# Altium PCB WorldClock.PcbDoc (part 5 of 13)
Units mil, origin at the board's own origin, x right, y up, seen from the top; angles counter-clockwise.
Board outline 3700 x 3850 mil, 2 copper layers (Top Layer, Bottom Layer); 227 components, 134 nets, 1324 pads, 248 vias.
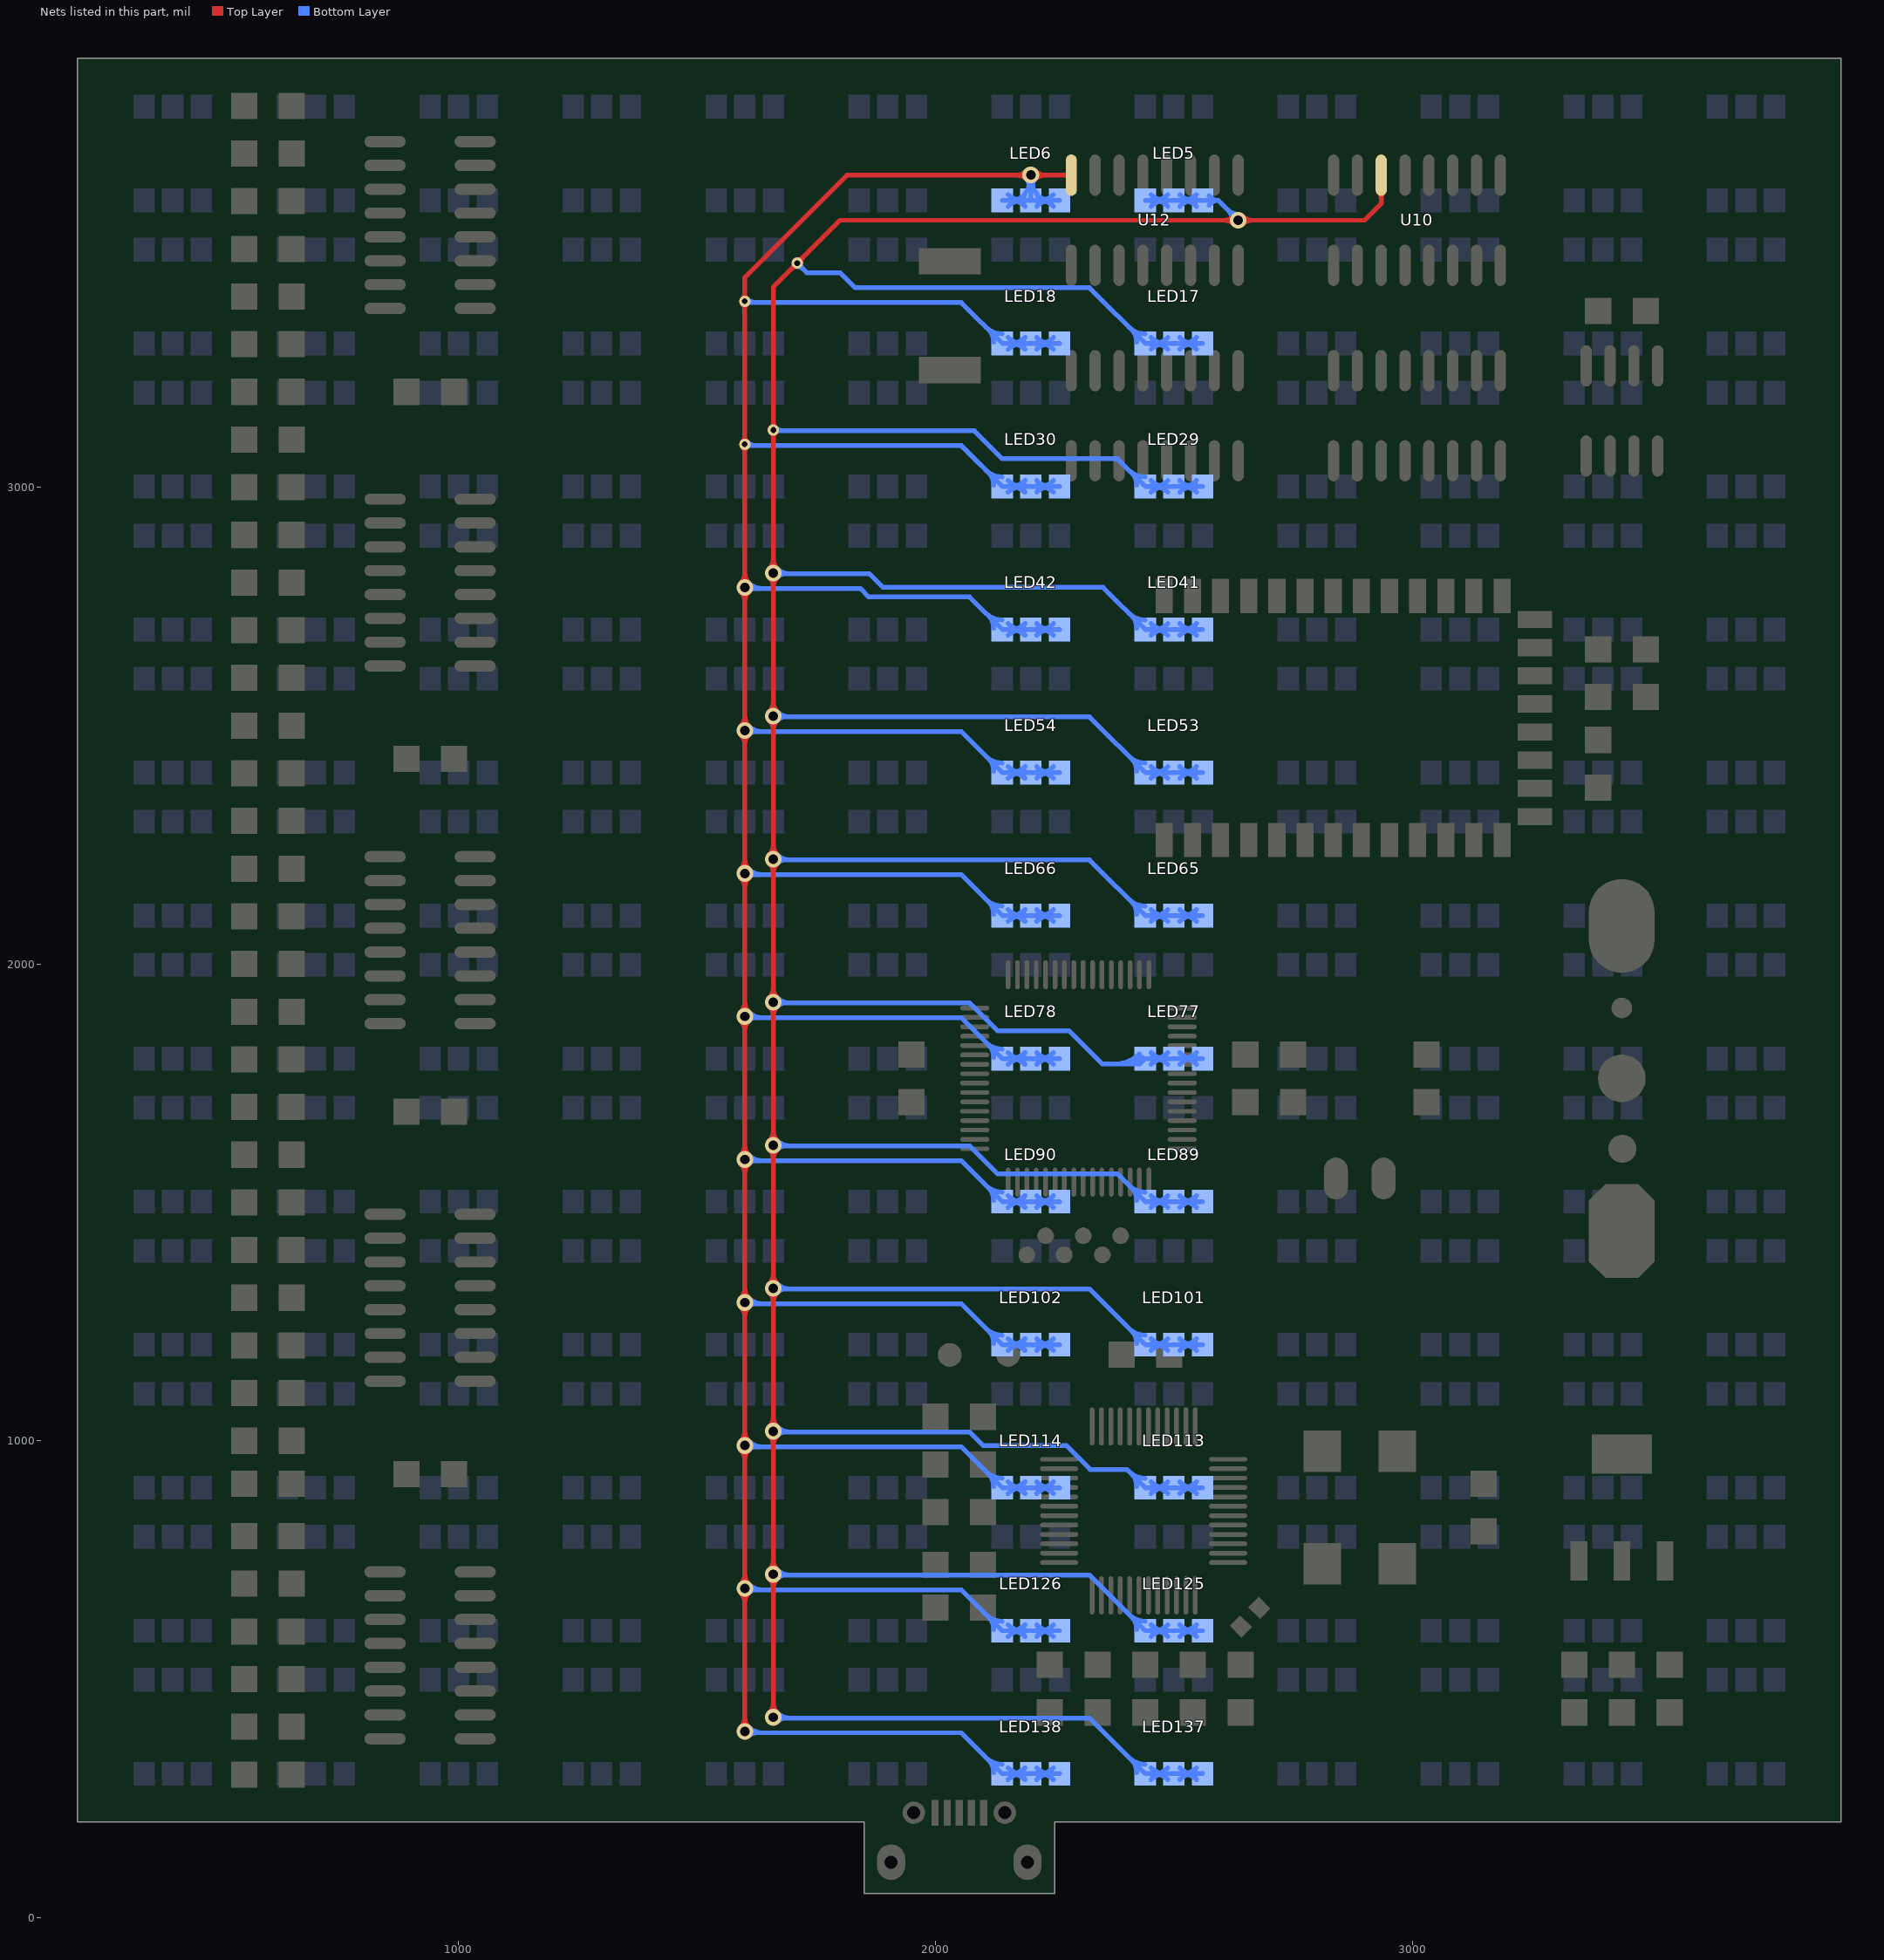
[diagram p5: the nets of this part, all layers, seen from the top]

## Via types
v1: diameter 35, hole 20, Top Layer to Bottom Layer, tented both sides, 213 vias
v2: diameter 24, hole 12, Top Layer to Bottom Layer, tented both sides, 35 vias

## Nets (pads, with @x,y where several pads share a name; then routed paths per layer and width w, separated by ;. In a path a pad name is that pad's centre, name@x,y a point inside that pad or via, vN(x,y) a via of type N, cw(c..) or ccw(c..) an arc to the next point about the centre after c; other vN are vias at no path point) (continued)
CH5: LED5.4 LED5.5 LED5.6 LED17.4 LED17.5 LED17.6 LED29.4 LED29.5 LED29.6 LED41.4 LED41.5 LED41.6 LED53.4 LED53.5 LED53.6 LED65.4 LED65.5 LED65.6 LED77.4 LED77.5 LED77.6 LED89.4 LED89.5 LED89.6 LED101.4 LED101.5 LED101.6 LED113.4 LED113.5 LED113.6 LED125.4 LED125.5 LED125.6 LED137.4 LED137.5 LED137.6 U10.14 | length 21913.4
  Top Layer w10: v1@1651.16,428.84 ccw(c1629.82,450.18) 1660,450.18 ccw(c1690.18,450.18) v1@1668.84,428.84 ; v1@1651.16,711.16 cw(c1629.82,689.82) 1660,689.82 cw(c1690.18,689.82) v1@1668.84,711.16 ; v1@1651.16,728.84 ccw(c1629.82,750.18) 1660,750.18 ccw(c1690.18,750.18) v1@1668.84,728.84 ; v1@1651.16,1011.16 cw(c1629.82,989.82) 1660,989.82 cw(c1690.18,989.82) v1@1668.84,1011.16 ; v1@1651.16,1028.84 ccw(c1629.82,1050.18) 1660,1050.18 ccw(c1690.18,1050.18) v1@1668.84,1028.84 ; v1@1651.16,1311.16 cw(c1629.82,1289.82) 1660,1289.82 cw(c1690.18,1289.82) v1@1668.84,1311.16 ; v1@1651.16,1328.84 ccw(c1629.82,1350.18) 1660,1350.18 ccw(c1690.18,1350.18) v1@1668.84,1328.84 ; v1@1651.16,1611.16 cw(c1629.82,1589.82) 1660,1589.82 cw(c1690.18,1589.82) v1@1668.84,1611.16 ; v1@1651.16,1628.84 ccw(c1629.82,1650.18) 1660,1650.18 ccw(c1690.18,1650.18) v1@1668.84,1628.84 ; v1@1651.16,1911.16 cw(c1629.82,1889.82) 1660,1889.82 cw(c1690.18,1889.82) v1@1668.84,1911.16 ; v1@1651.16,1928.84 ccw(c1629.82,1950.18) 1660,1950.18 ccw(c1690.18,1950.18) v1@1668.84,1928.84 ; v1@1651.16,2211.16 cw(c1629.82,2189.82) 1660,2189.82 cw(c1690.18,2189.82) v1@1668.84,2211.16 ; v1@1651.16,2228.84 ccw(c1629.82,2250.18) 1660,2250.18 ccw(c1690.18,2250.18) v1@1668.84,2228.84 ; v1@1651.16,2511.16 cw(c1629.82,2489.82) 1660,2489.82 cw(c1690.18,2489.82) v1@1668.84,2511.16 ; v1@1651.16,2528.84 ccw(c1629.82,2550.18) 1660,2550.18 ccw(c1690.18,2550.18) v1@1668.84,2528.84 ; v1@1651.16,2811.16 cw(c1629.82,2789.82) 1660,2789.82 cw(c1690.18,2789.82) v1@1668.84,2811.16 ; v1@1651.16,2828.84 ccw(c1629.82,2850.18) 1660,2850.18 ccw(c1690.18,2850.18) v1@1668.84,2828.84 ; v2@1655.05,3115.05 cw(c1643.1,3103.1) 1660,3103.1 cw(c1676.9,3103.1) v2@1664.95,3115.05 ; v2@1655.05,3124.95 ccw(c1643.1,3136.9) 1660,3136.9 ccw(c1676.9,3136.9) v2@1664.95,3124.95 ; v1(1660,420) v1(1660,720) v1(1660,1020) v1(1660,1320) v1(1660,1620) v1(1660,1920) v1(1660,2220) v1(1660,2520) v1(1660,2820) v2(1660,3120) 1660,3420 v2(1710,3470) 1800,3560 v1(2635,3560) 2900,3560 2935,3595 U10.14@2935,3654.49 ; v2@1703,3470 cw(c1686.1,3470) 1698.05,3458.05 cw(c1710,3446.1) v2@1710,3463 ; v2@1710,3477 ccw(c1710,3493.9) 1721.95,3481.95 ccw(c1733.9,3470) v2@1717,3470 ; v1@2626.16,3551.16 ccw(c2604.82,3529.82) 2604.82,3560 ccw(c2604.82,3590.18) v1@2626.16,3568.84 ; v1@2643.84,3551.16 cw(c2665.18,3529.82) 2665.18,3560 cw(c2665.18,3590.18) v1@2643.84,3568.84 ; U10.14@2930.18,3618.18 cw(c2918.56,3606.55) 2935,3606.55 cw(c2951.44,3606.55) U10.14@2939.82,3618.18
  Bottom Layer w10: v1(1660,420) 1661.57,418.43 2323.15,418.43 LED137.6@2440,301.57 LED137.5@2500,301.57 LED137.4@2560,301.57 ; v1(1660,720) 1661.57,718.43 2323.15,718.43 LED125.6@2440,601.57 LED125.5@2500,601.57 LED125.4@2560,601.57 ; v1(1660,1020) 1661.57,1018.43 2071.57,1018.43 2100,990 2274.54,990 2324.54,940 2401.57,940 LED113.6@2440,901.57 LED113.5@2500,901.57 LED113.4@2560,901.57 ; v1(1660,1320) 1661.57,1318.43 2323.15,1318.43 LED101.6@2440,1201.57 LED101.5@2500,1201.57 LED101.4@2560,1201.57 ; v1(1660,1620) 1661.57,1618.43 2071.57,1618.43 2130,1560 2381.57,1560 LED89.6@2440,1501.57 LED89.5@2500,1501.57 LED89.4@2560,1501.57 ; v1(1660,1920) 1661.57,1918.43 2071.57,1918.43 2130,1860 2280,1860 2350,1790 2428.43,1790 LED77.6@2440,1801.57 LED77.5@2500,1801.57 LED77.4@2560,1801.57 ; v1(1660,2220) 1661.57,2218.43 2323.15,2218.43 LED65.6@2440,2101.57 LED65.5@2500,2101.57 LED65.4@2560,2101.57 ; v1(1660,2520) 1661.57,2518.43 2323.15,2518.43 LED53.6@2440,2401.57 LED53.5@2500,2401.57 LED53.4@2560,2401.57 ; v1(1660,2820) 1661.57,2818.43 1861.57,2818.43 1890,2790 2351.57,2790 LED41.6@2440,2701.57 LED41.5@2500,2701.57 LED41.4@2560,2701.57 ; v2(1660,3120) 1661.57,3118.43 2081.57,3118.43 2140,3060 2381.57,3060 LED29.6@2440,3001.57 LED29.5@2500,3001.57 LED29.4@2560,3001.57 ; v2@1664.95,3115.05 cw(c1673.1,3106.9) 1673.1,3118.43 ; v2@1664.95,3124.95 ccw(c1680.7,3140.7) 1680.7,3118.43 ; v1@1668.84,411.16 cw(c1686.38,393.62) 1686.38,418.43 ; v1@1668.84,428.84 ccw(c1693.98,453.98) 1693.98,418.43 ; v1@1668.84,711.16 cw(c1686.38,693.62) 1686.38,718.43 ; v1@1668.84,728.84 ccw(c1693.98,753.98) 1693.98,718.43 ; v1@1668.84,1011.16 cw(c1686.38,993.62) 1686.38,1018.43 ; v1@1668.84,1028.84 ccw(c1693.98,1053.98) 1693.98,1018.43 ; v1@1668.84,1311.16 cw(c1686.38,1293.62) 1686.38,1318.43 ; v1@1668.84,1328.84 ccw(c1693.98,1353.98) 1693.98,1318.43 ; v1@1668.84,1611.16 cw(c1686.38,1593.62) 1686.38,1618.43 ; v1@1668.84,1628.84 ccw(c1693.98,1653.98) 1693.98,1618.43 ; v1@1668.84,1911.16 cw(c1686.38,1893.62) 1686.38,1918.43 ; v1@1668.84,1928.84 ccw(c1693.98,1953.98) 1693.98,1918.43 ; v1@1668.84,2211.16 cw(c1686.38,2193.62) 1686.38,2218.43 ; v1@1668.84,2228.84 ccw(c1693.98,2253.98) 1693.98,2218.43 ; v1@1668.84,2511.16 cw(c1686.38,2493.62) 1686.38,2518.43 ; v1@1668.84,2528.84 ccw(c1693.98,2553.98) 1693.98,2518.43 ; v1@1668.84,2811.16 cw(c1686.38,2793.62) 1686.38,2818.43 ; v1@1668.84,2828.84 ccw(c1693.98,2853.98) 1693.98,2818.43 ; v2@1710,3463 cw(c1710,3446.1) 1721.95,3458.05 cw(c1733.9,3470) v2@1717,3470 ; v2(1710,3470) 1730,3450 1800,3450 1831.57,3418.43 2323.15,3418.43 LED17.6@2440,3301.57 LED17.5@2500,3301.57 LED17.4@2560,3301.57 ; 2375.84,1790 ccw(c2375.84,1863.23) LED77.6@2427.63,1811.45 ; 2399.98,1790 ccw(c2399.98,1839.09) LED77.6@2434.7,1804.38 ; 2405.86,335.72 ccw(c2440,369.86) LED137.6@2440,321.57 ; 2405.86,635.72 ccw(c2440,669.86) LED125.6@2440,621.57 ; 2405.86,935.72 ccw(c2440,969.86) LED113.6@2440,921.57 ; 2405.86,1235.72 ccw(c2440,1269.86) LED101.6@2440,1221.57 ; 2405.86,1535.72 ccw(c2440,1569.86) LED89.6@2440,1521.57 ; 2405.86,2135.72 ccw(c2440,2169.86) LED65.6@2440,2121.57 ; 2405.86,2435.72 ccw(c2440,2469.86) LED53.6@2440,2421.57 ; 2405.86,2735.72 ccw(c2440,2769.86) LED41.6@2440,2721.57 ; 2405.86,3035.72 ccw(c2440,3069.86) LED29.6@2440,3021.57 ; 2405.86,3335.72 ccw(c2440,3369.86) LED17.6@2440,3321.57 ; 2411.89,329.68 cw(c2386.29,304.07) LED137.6@2422.5,304.07 ; 2411.89,629.68 cw(c2386.29,604.07) LED125.6@2422.5,604.07 ; 2411.89,929.68 cw(c2386.29,904.07) LED113.6@2422.5,904.07 ; 2411.89,1229.68 cw(c2386.29,1204.07) LED101.6@2422.5,1204.07 ; 2411.89,1529.68 cw(c2386.29,1504.07) LED89.6@2422.5,1504.07 ; 2411.89,2129.68 cw(c2386.29,2104.07) LED65.6@2422.5,2104.07 ; 2411.89,2429.68 cw(c2386.29,2404.07) LED53.6@2422.5,2404.07 ; 2411.89,2729.68 cw(c2386.29,2704.07) LED41.6@2422.5,2704.07 ; 2411.89,3029.68 cw(c2386.29,3004.07) LED29.6@2422.5,3004.07 ; 2411.89,3329.68 cw(c2386.29,3304.07) LED17.6@2422.5,3304.07 ; LED5.6@2440,3601.57 LED5.5@2500,3601.57 LED5.4@2560,3601.57 2593.43,3601.57 v1(2635,3560) ; LED137.6@2452.37,289.2 cw(c2482.25,259.33) 2482.25,301.57 cw(c2482.25,343.82) LED137.6@2452.37,313.95 ; LED125.6@2452.37,589.2 cw(c2482.25,559.33) 2482.25,601.57 cw(c2482.25,643.82) LED125.6@2452.37,613.95 ; LED113.6@2452.37,889.2 cw(c2482.25,859.33) 2482.25,901.57 cw(c2482.25,943.82) LED113.6@2452.37,913.95 ; LED101.6@2452.37,1189.2 cw(c2482.25,1159.33) 2482.25,1201.57 cw(c2482.25,1243.82) LED101.6@2452.37,1213.95 ; LED89.6@2452.37,1489.2 cw(c2482.25,1459.33) 2482.25,1501.57 cw(c2482.25,1543.82) LED89.6@2452.37,1513.95 ; LED77.6@2452.37,1789.2 cw(c2482.25,1759.33) 2482.25,1801.57 cw(c2482.25,1843.82) LED77.6@2452.37,1813.95 ; LED65.6@2452.37,2089.2 cw(c2482.25,2059.33) 2482.25,2101.57 cw(c2482.25,2143.82) LED65.6@2452.37,2113.95 ; LED53.6@2452.37,2389.2 cw(c2482.25,2359.33) 2482.25,2401.57 cw(c2482.25,2443.82) LED53.6@2452.37,2413.95 ; LED41.6@2452.37,2689.2 cw(c2482.25,2659.33) 2482.25,2701.57 cw(c2482.25,2743.82) LED41.6@2452.37,2713.95 ; LED29.6@2452.37,2989.2 cw(c2482.25,2959.33) 2482.25,3001.57 cw(c2482.25,3043.82) LED29.6@2452.37,3013.95 ; LED17.6@2452.37,3289.2 cw(c2482.25,3259.33) 2482.25,3301.57 cw(c2482.25,3343.82) LED17.6@2452.37,3313.95 ; LED5.6@2452.37,3589.2 cw(c2482.25,3559.33) 2482.25,3601.57 cw(c2482.25,3643.82) LED5.6@2452.37,3613.95 ; LED137.6@2455.16,295.32 cw(c2471.02,286.17) 2466.28,303.86 ; LED137.6@2455.16,307.82 ccw(c2471.02,316.98) 2466.28,299.29 ; LED125.6@2455.16,595.32 cw(c2471.02,586.17) 2466.28,603.86 ; LED125.6@2455.16,607.82 ccw(c2471.02,616.98) 2466.28,599.29 ; LED113.6@2455.16,895.32 cw(c2471.02,886.17) 2466.28,903.86 ; LED113.6@2455.16,907.82 ccw(c2471.02,916.98) 2466.28,899.29 ; LED101.6@2455.16,1195.32 cw(c2471.02,1186.17) 2466.28,1203.86 ; LED101.6@2455.16,1207.82 ccw(c2471.02,1216.98) 2466.28,1199.29 ; LED89.6@2455.16,1495.32 cw(c2471.02,1486.17) 2466.28,1503.86 ; LED89.6@2455.16,1507.82 ccw(c2471.02,1516.98) 2466.28,1499.29 ; LED77.6@2455.16,1795.32 cw(c2471.02,1786.17) 2466.28,1803.86 ; LED77.6@2455.16,1807.82 ccw(c2471.02,1816.98) 2466.28,1799.29 ; LED65.6@2455.16,2095.32 cw(c2471.02,2086.17) 2466.28,2103.86 ; LED65.6@2455.16,2107.82 ccw(c2471.02,2116.98) 2466.28,2099.29 ; LED53.6@2455.16,2395.32 cw(c2471.02,2386.17) 2466.28,2403.86 ; LED53.6@2455.16,2407.82 ccw(c2471.02,2416.98) 2466.28,2399.29 ; LED41.6@2455.16,2695.32 cw(c2471.02,2686.17) 2466.28,2703.86 ; LED41.6@2455.16,2707.82 ccw(c2471.02,2716.98) 2466.28,2699.29 ; LED29.6@2455.16,2995.32 cw(c2471.02,2986.17) 2466.28,3003.86 ; LED29.6@2455.16,3007.82 ccw(c2471.02,3016.98) 2466.28,2999.29 ; LED17.6@2455.16,3295.32 cw(c2471.02,3286.17) 2466.28,3303.86 ; LED17.6@2455.16,3307.82 ccw(c2471.02,3316.98) 2466.28,3299.29 ; LED5.6@2455.16,3595.32 cw(c2471.02,3586.17) 2466.28,3603.86 ; LED5.6@2455.16,3607.82 ccw(c2471.02,3616.98) 2466.28,3599.29 ; LED137.6@2456.56,293.41 cw(c2464.87,290.57) 2467.15,299.06 ; LED137.6@2456.56,309.74 ccw(c2464.87,312.58) 2467.15,304.09 ; LED125.6@2456.56,593.41 cw(c2464.87,590.57) 2467.15,599.06 ; LED125.6@2456.56,609.74 ccw(c2464.87,612.58) 2467.15,604.09 ; LED113.6@2456.56,893.41 cw(c2464.87,890.57) 2467.15,899.06 ; LED113.6@2456.56,909.74 ccw(c2464.87,912.58) 2467.15,904.09 ; LED101.6@2456.56,1193.41 cw(c2464.87,1190.57) 2467.15,1199.06 ; LED101.6@2456.56,1209.74 ccw(c2464.87,1212.58) 2467.15,1204.09 ; LED89.6@2456.56,1493.41 cw(c2464.87,1490.57) 2467.15,1499.06 ; LED89.6@2456.56,1509.74 ccw(c2464.87,1512.58) 2467.15,1504.09 ; LED77.6@2456.56,1793.41 cw(c2464.87,1790.57) 2467.15,1799.06 ; LED77.6@2456.56,1809.74 ccw(c2464.87,1812.58) 2467.15,1804.09 ; LED65.6@2456.56,2093.41 cw(c2464.87,2090.57) 2467.15,2099.06 ; LED65.6@2456.56,2109.74 ccw(c2464.87,2112.58) 2467.15,2104.09 ; LED53.6@2456.56,2393.41 cw(c2464.87,2390.57) 2467.15,2399.06 ; LED53.6@2456.56,2409.74 ccw(c2464.87,2412.58) 2467.15,2404.09 ; LED41.6@2456.56,2693.41 cw(c2464.87,2690.57) 2467.15,2699.06 ; LED41.6@2456.56,2709.74 ccw(c2464.87,2712.58) 2467.15,2704.09 ; LED29.6@2456.56,2993.41 cw(c2464.87,2990.57) 2467.15,2999.06 ; LED29.6@2456.56,3009.74 ccw(c2464.87,3012.58) 2467.15,3004.09 ; LED17.6@2456.56,3293.41 cw(c2464.87,3290.57) 2467.15,3299.06 ; LED17.6@2456.56,3309.74 ccw(c2464.87,3312.58) 2467.15,3304.09 ; LED5.6@2456.56,3593.41 cw(c2464.87,3590.57) 2467.15,3599.06 ; LED5.6@2456.56,3609.74 ccw(c2464.87,3612.58) 2467.15,3604.09 ; LED137.5@2487.63,289.2 ccw(c2457.75,259.33) 2457.75,301.57 ccw(c2457.75,343.82) LED137.5@2487.63,313.95 ; LED125.5@2487.63,589.2 ccw(c2457.75,559.33) 2457.75,601.57 ccw(c2457.75,643.82) LED125.5@2487.63,613.95 ; LED113.5@2487.63,889.2 ccw(c2457.75,859.33) 2457.75,901.57 ccw(c2457.75,943.82) LED113.5@2487.63,913.95 ; LED101.5@2487.63,1189.2 ccw(c2457.75,1159.33) 2457.75,1201.57 ccw(c2457.75,1243.82) LED101.5@2487.63,1213.95 ; LED89.5@2487.63,1489.2 ccw(c2457.75,1459.33) 2457.75,1501.57 ccw(c2457.75,1543.82) LED89.5@2487.63,1513.95 ; LED77.5@2487.63,1789.2 ccw(c2457.75,1759.33) 2457.75,1801.57 ccw(c2457.75,1843.82) LED77.5@2487.63,1813.95 ; LED65.5@2487.63,2089.2 ccw(c2457.75,2059.33) 2457.75,2101.57 ccw(c2457.75,2143.82) LED65.5@2487.63,2113.95 ; LED53.5@2487.63,2389.2 ccw(c2457.75,2359.33) 2457.75,2401.57 ccw(c2457.75,2443.82) LED53.5@2487.63,2413.95 ; LED41.5@2487.63,2689.2 ccw(c2457.75,2659.33) 2457.75,2701.57 ccw(c2457.75,2743.82) LED41.5@2487.63,2713.95 ; LED29.5@2487.63,2989.2 ccw(c2457.75,2959.33) 2457.75,3001.57 ccw(c2457.75,3043.82) LED29.5@2487.63,3013.95 ; LED17.5@2487.63,3289.2 ccw(c2457.75,3259.33) 2457.75,3301.57 ccw(c2457.75,3343.82) LED17.5@2487.63,3313.95 ; LED5.5@2487.63,3589.2 ccw(c2457.75,3559.33) 2457.75,3601.57 ccw(c2457.75,3643.82) LED5.5@2487.63,3613.95 ; LED137.5@2512.37,289.2 cw(c2542.25,259.33) 2542.25,301.57 cw(c2542.25,343.82) LED137.5@2512.37,313.95 ; LED125.5@2512.37,589.2 cw(c2542.25,559.33) 2542.25,601.57 cw(c2542.25,643.82) LED125.5@2512.37,613.95 ; LED113.5@2512.37,889.2 cw(c2542.25,859.33) 2542.25,901.57 cw(c2542.25,943.82) LED113.5@2512.37,913.95 ; LED101.5@2512.37,1189.2 cw(c2542.25,1159.33) 2542.25,1201.57 cw(c2542.25,1243.82) LED101.5@2512.37,1213.95 ; LED89.5@2512.37,1489.2 cw(c2542.25,1459.33) 2542.25,1501.57 cw(c2542.25,1543.82) LED89.5@2512.37,1513.95 ; LED77.5@2512.37,1789.2 cw(c2542.25,1759.33) 2542.25,1801.57 cw(c2542.25,1843.82) LED77.5@2512.37,1813.95 ; LED65.5@2512.37,2089.2 cw(c2542.25,2059.33) 2542.25,2101.57 cw(c2542.25,2143.82) LED65.5@2512.37,2113.95 ; LED53.5@2512.37,2389.2 cw(c2542.25,2359.33) 2542.25,2401.57 cw(c2542.25,2443.82) LED53.5@2512.37,2413.95 ; LED41.5@2512.37,2689.2 cw(c2542.25,2659.33) 2542.25,2701.57 cw(c2542.25,2743.82) LED41.5@2512.37,2713.95 ; LED29.5@2512.37,2989.2 cw(c2542.25,2959.33) 2542.25,3001.57 cw(c2542.25,3043.82) LED29.5@2512.37,3013.95 ; LED17.5@2512.37,3289.2 cw(c2542.25,3259.33) 2542.25,3301.57 cw(c2542.25,3343.82) LED17.5@2512.37,3313.95 ; LED5.5@2512.37,3589.2 cw(c2542.25,3559.33) 2542.25,3601.57 cw(c2542.25,3643.82) LED5.5@2512.37,3613.95 ; 2532.85,299.06 cw(c2535.13,290.57) LED137.4@2543.44,293.41 ; 2532.85,304.09 ccw(c2535.13,312.58) LED137.4@2543.44,309.74 ; 2532.85,599.06 cw(c2535.13,590.57) LED125.4@2543.44,593.41 ; 2532.85,604.09 ccw(c2535.13,612.58) LED125.4@2543.44,609.74 ; 2532.85,899.06 cw(c2535.13,890.57) LED113.4@2543.44,893.41 ; 2532.85,904.09 ccw(c2535.13,912.58) LED113.4@2543.44,909.74 ; 2532.85,1199.06 cw(c2535.13,1190.57) LED101.4@2543.44,1193.41 ; 2532.85,1204.09 ccw(c2535.13,1212.58) LED101.4@2543.44,1209.74 ; 2532.85,1499.06 cw(c2535.13,1490.57) LED89.4@2543.44,1493.41 ; 2532.85,1504.09 ccw(c2535.13,1512.58) LED89.4@2543.44,1509.74 ; 2532.85,1799.06 cw(c2535.13,1790.57) LED77.4@2543.44,1793.41 ; 2532.85,1804.09 ccw(c2535.13,1812.58) LED77.4@2543.44,1809.74 ; 2532.85,2099.06 cw(c2535.13,2090.57) LED65.4@2543.44,2093.41 ; 2532.85,2104.09 ccw(c2535.13,2112.58) LED65.4@2543.44,2109.74 ; 2532.85,2399.06 cw(c2535.13,2390.57) LED53.4@2543.44,2393.41 ; 2532.85,2404.09 ccw(c2535.13,2412.58) LED53.4@2543.44,2409.74 ; 2532.85,2699.06 cw(c2535.13,2690.57) LED41.4@2543.44,2693.41 ; 2532.85,2704.09 ccw(c2535.13,2712.58) LED41.4@2543.44,2709.74 ; 2532.85,2999.06 cw(c2535.13,2990.57) LED29.4@2543.44,2993.41 ; 2532.85,3004.09 ccw(c2535.13,3012.58) LED29.4@2543.44,3009.74 ; 2532.85,3299.06 cw(c2535.13,3290.57) LED17.4@2543.44,3293.41 ; 2532.85,3304.09 ccw(c2535.13,3312.58) LED17.4@2543.44,3309.74 ; 2532.85,3599.06 cw(c2535.13,3590.57) LED5.4@2543.44,3593.41 ; 2532.85,3604.09 ccw(c2535.13,3612.58) LED5.4@2543.44,3609.74 ; 2533.72,299.29 ccw(c2528.98,316.98) LED137.4@2544.84,307.82 ; 2533.72,303.86 cw(c2528.98,286.17) LED137.4@2544.84,295.32 ; 2533.72,599.29 ccw(c2528.98,616.98) LED125.4@2544.84,607.82 ; 2533.72,603.86 cw(c2528.98,586.17) LED125.4@2544.84,595.32 ; 2533.72,899.29 ccw(c2528.98,916.98) LED113.4@2544.84,907.82 ; 2533.72,903.86 cw(c2528.98,886.17) LED113.4@2544.84,895.32 ; 2533.72,1199.29 ccw(c2528.98,1216.98) LED101.4@2544.84,1207.82 ; 2533.72,1203.86 cw(c2528.98,1186.17) LED101.4@2544.84,1195.32 ; 2533.72,1499.29 ccw(c2528.98,1516.98) LED89.4@2544.84,1507.82 ; 2533.72,1503.86 cw(c2528.98,1486.17) LED89.4@2544.84,1495.32 ; 2533.72,1799.29 ccw(c2528.98,1816.98) LED77.4@2544.84,1807.82 ; 2533.72,1803.86 cw(c2528.98,1786.17) LED77.4@2544.84,1795.32 ; 2533.72,2099.29 ccw(c2528.98,2116.98) LED65.4@2544.84,2107.82 ; 2533.72,2103.86 cw(c2528.98,2086.17) LED65.4@2544.84,2095.32 ; 2533.72,2399.29 ccw(c2528.98,2416.98) LED53.4@2544.84,2407.82 ; 2533.72,2403.86 cw(c2528.98,2386.17) LED53.4@2544.84,2395.32 ; 2533.72,2699.29 ccw(c2528.98,2716.98) LED41.4@2544.84,2707.82 ; 2533.72,2703.86 cw(c2528.98,2686.17) LED41.4@2544.84,2695.32 ; 2533.72,2999.29 ccw(c2528.98,3016.98) LED29.4@2544.84,3007.82 ; 2533.72,3003.86 cw(c2528.98,2986.17) LED29.4@2544.84,2995.32 ; 2533.72,3299.29 ccw(c2528.98,3316.98) LED17.4@2544.84,3307.82 ; 2533.72,3303.86 cw(c2528.98,3286.17) LED17.4@2544.84,3295.32 ; 2533.72,3599.29 ccw(c2528.98,3616.98) LED5.4@2544.84,3607.82 ; 2533.72,3603.86 cw(c2528.98,3586.17) LED5.4@2544.84,3595.32 ; LED137.4@2547.63,289.2 ccw(c2517.75,259.33) 2517.75,301.57 ccw(c2517.75,343.82) LED137.4@2547.63,313.95 ; LED125.4@2547.63,589.2 ccw(c2517.75,559.33) 2517.75,601.57 ccw(c2517.75,643.82) LED125.4@2547.63,613.95 ; LED113.4@2547.63,889.2 ccw(c2517.75,859.33) 2517.75,901.57 ccw(c2517.75,943.82) LED113.4@2547.63,913.95 ; LED101.4@2547.63,1189.2 ccw(c2517.75,1159.33) 2517.75,1201.57 ccw(c2517.75,1243.82) LED101.4@2547.63,1213.95 ; LED89.4@2547.63,1489.2 ccw(c2517.75,1459.33) 2517.75,1501.57 ccw(c2517.75,1543.82) LED89.4@2547.63,1513.95 ; LED77.4@2547.63,1789.2 ccw(c2517.75,1759.33) 2517.75,1801.57 ccw(c2517.75,1843.82) LED77.4@2547.63,1813.95 ; LED65.4@2547.63,2089.2 ccw(c2517.75,2059.33) 2517.75,2101.57 ccw(c2517.75,2143.82) LED65.4@2547.63,2113.95 ; LED53.4@2547.63,2389.2 ccw(c2517.75,2359.33) 2517.75,2401.57 ccw(c2517.75,2443.82) LED53.4@2547.63,2413.95 ; LED41.4@2547.63,2689.2 ccw(c2517.75,2659.33) 2517.75,2701.57 ccw(c2517.75,2743.82) LED41.4@2547.63,2713.95 ; LED29.4@2547.63,2989.2 ccw(c2517.75,2959.33) 2517.75,3001.57 ccw(c2517.75,3043.82) LED29.4@2547.63,3013.95 ; LED17.4@2547.63,3289.2 ccw(c2517.75,3259.33) 2517.75,3301.57 ccw(c2517.75,3343.82) LED17.4@2547.63,3313.95 ; LED5.4@2547.63,3589.2 ccw(c2517.75,3559.33) 2517.75,3601.57 ccw(c2517.75,3643.82) LED5.4@2547.63,3613.95 ; LED5.4@2574.38,3591.61 cw(c2593.42,3578.41) 2593.42,3601.57 cw(c2593.42,3624.74) LED5.4@2574.38,3611.54 ; v1@2622.5,3560 ccw(c2592.32,3560) 2613.66,3581.34 ccw(c2635,3602.68) v1@2635,3572.5
CH6: LED6.4 LED6.5 LED6.6 LED18.4 LED18.5 LED18.6 LED30.4 LED30.5 LED30.6 LED42.4 LED42.5 LED42.6 LED54.4 LED54.5 LED54.6 LED66.4 LED66.5 LED66.6 LED78.4 LED78.5 LED78.6 LED90.4 LED90.5 LED90.6 LED102.4 LED102.5 LED102.6 LED114.4 LED114.5 LED114.6 LED126.4 LED126.5 LED126.6 LED138.4 LED138.5 LED138.6 U12.16 | length 18586.2
  Top Layer w10: v1@1591.16,398.84 ccw(c1569.82,420.18) 1600,420.18 ccw(c1630.18,420.18) v1@1608.84,398.84 ; v1@1591.16,681.16 cw(c1569.82,659.82) 1600,659.82 cw(c1630.18,659.82) v1@1608.84,681.16 ; v1@1591.16,698.84 ccw(c1569.82,720.18) 1600,720.18 ccw(c1630.18,720.18) v1@1608.84,698.84 ; v1@1591.16,981.16 cw(c1569.82,959.82) 1600,959.82 cw(c1630.18,959.82) v1@1608.84,981.16 ; v1@1591.16,998.84 ccw(c1569.82,1020.18) 1600,1020.18 ccw(c1630.18,1020.18) v1@1608.84,998.84 ; v1@1591.16,1281.16 cw(c1569.82,1259.82) 1600,1259.82 cw(c1630.18,1259.82) v1@1608.84,1281.16 ; v1@1591.16,1298.84 ccw(c1569.82,1320.18) 1600,1320.18 ccw(c1630.18,1320.18) v1@1608.84,1298.84 ; v1@1591.16,1581.16 cw(c1569.82,1559.82) 1600,1559.82 cw(c1630.18,1559.82) v1@1608.84,1581.16 ; v1@1591.16,1598.84 ccw(c1569.82,1620.18) 1600,1620.18 ccw(c1630.18,1620.18) v1@1608.84,1598.84 ; v1@1591.16,1881.16 cw(c1569.82,1859.82) 1600,1859.82 cw(c1630.18,1859.82) v1@1608.84,1881.16 ; v1@1591.16,1898.84 ccw(c1569.82,1920.18) 1600,1920.18 ccw(c1630.18,1920.18) v1@1608.84,1898.84 ; v1@1591.16,2181.16 cw(c1569.82,2159.82) 1600,2159.82 cw(c1630.18,2159.82) v1@1608.84,2181.16 ; v1@1591.16,2198.84 ccw(c1569.82,2220.18) 1600,2220.18 ccw(c1630.18,2220.18) v1@1608.84,2198.84 ; v1@1591.16,2481.16 cw(c1569.82,2459.82) 1600,2459.82 cw(c1630.18,2459.82) v1@1608.84,2481.16 ; v1@1591.16,2498.84 ccw(c1569.82,2520.18) 1600,2520.18 ccw(c1630.18,2520.18) v1@1608.84,2498.84 ; v1@1591.16,2781.16 cw(c1569.82,2759.82) 1600,2759.82 cw(c1630.18,2759.82) v1@1608.84,2781.16 ; v1@1591.16,2798.84 ccw(c1569.82,2820.18) 1600,2820.18 ccw(c1630.18,2820.18) v1@1608.84,2798.84 ; v2@1595.05,3085.05 cw(c1583.1,3073.1) 1600,3073.1 cw(c1616.9,3073.1) v2@1604.95,3085.05 ; v2@1595.05,3094.95 ccw(c1583.1,3106.9) 1600,3106.9 ccw(c1616.9,3106.9) v2@1604.95,3094.95 ; v2@1595.05,3385.05 cw(c1583.1,3373.1) 1600,3373.1 cw(c1616.9,3373.1) v2@1604.95,3385.05 ; v2@1595.05,3394.95 ccw(c1583.1,3406.9) 1600,3406.9 ccw(c1616.9,3406.9) v2@1604.95,3394.95 ; v1(1600,390) v1(1600,690) v1(1600,990) v1(1600,1290) v1(1600,1590) v1(1600,1890) v1(1600,2190) v1(1600,2490) v1(1600,2790) v2(1600,3090) v2(1600,3390) 1600,3440 1814.49,3654.49 U12.16@2285,3654.49 ; 2168.59,3654.49 ccw(c2168.59,3686.41) v1@2191.16,3663.84 ; 2171.06,3654.49 cw(c2171.06,3626.06) v1@2191.16,3646.16 ; v1@2208.84,3646.16 cw(c2228.94,3626.06) 2228.94,3654.49 ; v1@2208.84,3663.84 ccw(c2231.41,3686.41) 2231.41,3654.49 ; U12.16@2280.18,3649.67 ccw(c2268.56,3638.05) 2268.56,3654.49 ccw(c2268.56,3670.93) U12.16@2280.18,3659.3
  Bottom Layer w10: v1(1600,390) 1602.5,387.5 2054.07,387.5 LED138.6@2140,301.57 LED138.5@2200,301.57 LED138.4@2260,301.57 ; v1(1600,690) 1602.5,687.5 2054.07,687.5 LED126.6@2140,601.57 LED126.5@2200,601.57 LED126.4@2260,601.57 ; v1(1600,990) 1602.5,987.5 2054.07,987.5 LED114.6@2140,901.57 LED114.5@2200,901.57 LED114.4@2260,901.57 ; v1(1600,1290) 1602.5,1287.5 2054.07,1287.5 LED102.6@2140,1201.57 LED102.5@2200,1201.57 LED102.4@2260,1201.57 ; v1(1600,1590) 1602.5,1587.5 2054.07,1587.5 LED90.6@2140,1501.57 LED90.5@2200,1501.57 LED90.4@2260,1501.57 ; v1(1600,1890) 1602.5,1887.5 2054.07,1887.5 LED78.6@2140,1801.57 LED78.5@2200,1801.57 LED78.4@2260,1801.57 ; v1(1600,2190) 1602.5,2187.5 2054.07,2187.5 LED66.6@2140,2101.57 LED66.5@2200,2101.57 LED66.4@2260,2101.57 ; v1(1600,2490) 1602.5,2487.5 2054.07,2487.5 LED54.6@2140,2401.57 LED54.5@2200,2401.57 LED54.4@2260,2401.57 ; v1(1600,2790) 1602.5,2787.5 1842.5,2787.5 1860,2770 2071.57,2770 LED42.6@2140,2701.57 LED42.5@2200,2701.57 LED42.4@2260,2701.57 ; v2(1600,3090) 1602.5,3087.5 2054.07,3087.5 LED30.6@2140,3001.57 LED30.5@2200,3001.57 LED30.4@2260,3001.57 ; v2(1600,3390) 1602.5,3387.5 2054.07,3387.5 LED18.6@2140,3301.57 LED18.5@2200,3301.57 LED18.4@2260,3301.57 ; v2@1604.95,3094.95 ccw(c1622.94,3112.93) 1622.94,3087.5 ; v2@1604.95,3394.95 ccw(c1622.94,3412.93) 1622.94,3387.5 ; v1@1608.84,381.16 cw(c1624.14,365.86) 1624.14,387.5 ; v1@1608.84,398.84 ccw(c1636.21,426.21) 1636.21,387.5 ; v1@1608.84,681.16 cw(c1624.14,665.86) 1624.14,687.5 ; v1@1608.84,698.84 ccw(c1636.21,726.21) 1636.21,687.5 ; v1@1608.84,981.16 cw(c1624.14,965.86) 1624.14,987.5 ; v1@1608.84,998.84 ccw(c1636.21,1026.21) 1636.21,987.5 ; v1@1608.84,1281.16 cw(c1624.14,1265.86) 1624.14,1287.5 ; v1@1608.84,1298.84 ccw(c1636.21,1326.21) 1636.21,1287.5 ; v1@1608.84,1581.16 cw(c1624.14,1565.86) 1624.14,1587.5 ; v1@1608.84,1598.84 ccw(c1636.21,1626.21) 1636.21,1587.5 ; v1@1608.84,1881.16 cw(c1624.14,1865.86) 1624.14,1887.5 ; v1@1608.84,1898.84 ccw(c1636.21,1926.21) 1636.21,1887.5 ; v1@1608.84,2181.16 cw(c1624.14,2165.86) 1624.14,2187.5 ; v1@1608.84,2198.84 ccw(c1636.21,2226.21) 1636.21,2187.5 ; v1@1608.84,2481.16 cw(c1624.14,2465.86) 1624.14,2487.5 ; v1@1608.84,2498.84 ccw(c1636.21,2526.21) 1636.21,2487.5 ; v1@1608.84,2781.16 cw(c1624.14,2765.86) 1624.14,2787.5 ; v1@1608.84,2798.84 ccw(c1636.21,2826.21) 1636.21,2787.5 ; 2105.86,335.72 ccw(c2140,369.86) LED138.6@2140,321.57 ; 2105.86,635.72 ccw(c2140,669.86) LED126.6@2140,621.57 ; 2105.86,935.72 ccw(c2140,969.86) LED114.6@2140,921.57 ; 2105.86,1235.72 ccw(c2140,1269.86) LED102.6@2140,1221.57 ; 2105.86,1535.72 ccw(c2140,1569.86) LED90.6@2140,1521.57 ; 2105.86,1835.72 ccw(c2140,1869.86) LED78.6@2140,1821.57 ; 2105.86,2135.72 ccw(c2140,2169.86) LED66.6@2140,2121.57 ; 2105.86,2435.72 ccw(c2140,2469.86) LED54.6@2140,2421.57 ; 2105.86,2735.72 ccw(c2140,2769.86) LED42.6@2140,2721.57 ; 2105.86,3035.72 ccw(c2140,3069.86) LED30.6@2140,3021.57 ; 2105.86,3335.72 ccw(c2140,3369.86) LED18.6@2140,3321.57 ; 2111.89,329.68 cw(c2086.29,304.07) LED138.6@2122.5,304.07 ; 2111.89,629.68 cw(c2086.29,604.07) LED126.6@2122.5,604.07 ; 2111.89,929.68 cw(c2086.29,904.07) LED114.6@2122.5,904.07 ; 2111.89,1229.68 cw(c2086.29,1204.07) LED102.6@2122.5,1204.07 ; 2111.89,1529.68 cw(c2086.29,1504.07) LED90.6@2122.5,1504.07 ; 2111.89,1829.68 cw(c2086.29,1804.07) LED78.6@2122.5,1804.07 ; 2111.89,2129.68 cw(c2086.29,2104.07) LED66.6@2122.5,2104.07 ; 2111.89,2429.68 cw(c2086.29,2404.07) LED54.6@2122.5,2404.07 ; 2111.89,2729.68 cw(c2086.29,2704.07) LED42.6@2122.5,2704.07 ; 2111.89,3029.68 cw(c2086.29,3004.07) LED30.6@2122.5,3004.07 ; 2111.89,3329.68 cw(c2086.29,3304.07) LED18.6@2122.5,3304.07 ; LED6.6@2140,3601.57 LED6.5@2200,3601.57 ; LED138.6@2152.37,289.2 cw(c2182.25,259.33) 2182.25,301.57 cw(c2182.25,343.82) LED138.6@2152.37,313.95 ; LED126.6@2152.37,589.2 cw(c2182.25,559.33) 2182.25,601.57 cw(c2182.25,643.82) LED126.6@2152.37,613.95 ; LED114.6@2152.37,889.2 cw(c2182.25,859.33) 2182.25,901.57 cw(c2182.25,943.82) LED114.6@2152.37,913.95 ; LED102.6@2152.37,1189.2 cw(c2182.25,1159.33) 2182.25,1201.57 cw(c2182.25,1243.82) LED102.6@2152.37,1213.95 ; LED90.6@2152.37,1489.2 cw(c2182.25,1459.33) 2182.25,1501.57 cw(c2182.25,1543.82) LED90.6@2152.37,1513.95 ; LED78.6@2152.37,1789.2 cw(c2182.25,1759.33) 2182.25,1801.57 cw(c2182.25,1843.82) LED78.6@2152.37,1813.95 ; LED66.6@2152.37,2089.2 cw(c2182.25,2059.33) 2182.25,2101.57 cw(c2182.25,2143.82) LED66.6@2152.37,2113.95 ; LED54.6@2152.37,2389.2 cw(c2182.25,2359.33) 2182.25,2401.57 cw(c2182.25,2443.82) LED54.6@2152.37,2413.95 ; LED42.6@2152.37,2689.2 cw(c2182.25,2659.33) 2182.25,2701.57 cw(c2182.25,2743.82) LED42.6@2152.37,2713.95 ; LED30.6@2152.37,2989.2 cw(c2182.25,2959.33) 2182.25,3001.57 cw(c2182.25,3043.82) LED30.6@2152.37,3013.95 ; LED18.6@2152.37,3289.2 cw(c2182.25,3259.33) 2182.25,3301.57 cw(c2182.25,3343.82) LED18.6@2152.37,3313.95 ; LED6.6@2152.37,3589.2 cw(c2182.25,3559.33) 2182.25,3601.57 cw(c2182.25,3643.82) LED6.6@2152.37,3613.95 ; 2172.85,299.06 cw(c2175.13,290.57) LED138.5@2183.44,293.41 ; 2172.85,304.09 ccw(c2175.13,312.58) LED138.5@2183.44,309.74 ; 2172.85,599.06 cw(c2175.13,590.57) LED126.5@2183.44,593.41 ; 2172.85,604.09 ccw(c2175.13,612.58) LED126.5@2183.44,609.74 ; 2172.85,899.06 cw(c2175.13,890.57) LED114.5@2183.44,893.41 ; 2172.85,904.09 ccw(c2175.13,912.58) LED114.5@2183.44,909.74 ; 2172.85,1199.06 cw(c2175.13,1190.57) LED102.5@2183.44,1193.41 ; 2172.85,1204.09 ccw(c2175.13,1212.58) LED102.5@2183.44,1209.74 ; 2172.85,1499.06 cw(c2175.13,1490.57) LED90.5@2183.44,1493.41 ; 2172.85,1504.09 ccw(c2175.13,1512.58) LED90.5@2183.44,1509.74 ; 2172.85,1799.06 cw(c2175.13,1790.57) LED78.5@2183.44,1793.41 ; 2172.85,1804.09 ccw(c2175.13,1812.58) LED78.5@2183.44,1809.74 ; 2172.85,2099.06 cw(c2175.13,2090.57) LED66.5@2183.44,2093.41 ; 2172.85,2104.09 ccw(c2175.13,2112.58) LED66.5@2183.44,2109.74 ; 2172.85,2399.06 cw(c2175.13,2390.57) LED54.5@2183.44,2393.41 ; 2172.85,2404.09 ccw(c2175.13,2412.58) LED54.5@2183.44,2409.74 ; 2172.85,2699.06 cw(c2175.13,2690.57) LED42.5@2183.44,2693.41 ; 2172.85,2704.09 ccw(c2175.13,2712.58) LED42.5@2183.44,2709.74 ; 2172.85,2999.06 cw(c2175.13,2990.57) LED30.5@2183.44,2993.41 ; 2172.85,3004.09 ccw(c2175.13,3012.58) LED30.5@2183.44,3009.74 ; 2172.85,3299.06 cw(c2175.13,3290.57) LED18.5@2183.44,3293.41 ; 2172.85,3304.09 ccw(c2175.13,3312.58) LED18.5@2183.44,3309.74 ; 2172.85,3599.06 cw(c2175.13,3590.57) LED6.5@2183.44,3593.41 ; 2172.85,3604.09 ccw(c2175.13,3612.58) LED6.5@2183.44,3609.74 ; 2173.72,299.29 ccw(c2168.98,316.98) LED138.5@2184.84,307.82 ; 2173.72,303.86 cw(c2168.98,286.17) LED138.5@2184.84,295.32 ; 2173.72,599.29 ccw(c2168.98,616.98) LED126.5@2184.84,607.82 ; 2173.72,603.86 cw(c2168.98,586.17) LED126.5@2184.84,595.32 ; 2173.72,899.29 ccw(c2168.98,916.98) LED114.5@2184.84,907.82 ; 2173.72,903.86 cw(c2168.98,886.17) LED114.5@2184.84,895.32 ; 2173.72,1199.29 ccw(c2168.98,1216.98) LED102.5@2184.84,1207.82 ; 2173.72,1203.86 cw(c2168.98,1186.17) LED102.5@2184.84,1195.32 ; 2173.72,1499.29 ccw(c2168.98,1516.98) LED90.5@2184.84,1507.82 ; 2173.72,1503.86 cw(c2168.98,1486.17) LED90.5@2184.84,1495.32 ; 2173.72,1799.29 ccw(c2168.98,1816.98) LED78.5@2184.84,1807.82 ; 2173.72,1803.86 cw(c2168.98,1786.17) LED78.5@2184.84,1795.32 ; 2173.72,2099.29 ccw(c2168.98,2116.98) LED66.5@2184.84,2107.82 ; 2173.72,2103.86 cw(c2168.98,2086.17) LED66.5@2184.84,2095.32 ; 2173.72,2399.29 ccw(c2168.98,2416.98) LED54.5@2184.84,2407.82 ; 2173.72,2403.86 cw(c2168.98,2386.17) LED54.5@2184.84,2395.32 ; 2173.72,2699.29 ccw(c2168.98,2716.98) LED42.5@2184.84,2707.82 ; 2173.72,2703.86 cw(c2168.98,2686.17) LED42.5@2184.84,2695.32 ; 2173.72,2999.29 ccw(c2168.98,3016.98) LED30.5@2184.84,3007.82 ; 2173.72,3003.86 cw(c2168.98,2986.17) LED30.5@2184.84,2995.32 ; 2173.72,3299.29 ccw(c2168.98,3316.98) LED18.5@2184.84,3307.82 ; 2173.72,3303.86 cw(c2168.98,3286.17) LED18.5@2184.84,3295.32 ; 2173.72,3599.29 ccw(c2168.98,3616.98) LED6.5@2184.84,3607.82 ; 2173.72,3603.86 cw(c2168.98,3586.17) LED6.5@2184.84,3595.32 ; LED138.5@2187.63,289.2 ccw(c2157.75,259.33) 2157.75,301.57 ccw(c2157.75,343.82) LED138.5@2187.63,313.95 ; LED126.5@2187.63,589.2 ccw(c2157.75,559.33) 2157.75,601.57 ccw(c2157.75,643.82) LED126.5@2187.63,613.95 ; LED114.5@2187.63,889.2 ccw(c2157.75,859.33) 2157.75,901.57 ccw(c2157.75,943.82) LED114.5@2187.63,913.95 ; LED102.5@2187.63,1189.2 ccw(c2157.75,1159.33) 2157.75,1201.57 ccw(c2157.75,1243.82) LED102.5@2187.63,1213.95 ; LED90.5@2187.63,1489.2 ccw(c2157.75,1459.33) 2157.75,1501.57 ccw(c2157.75,1543.82) LED90.5@2187.63,1513.95 ; LED78.5@2187.63,1789.2 ccw(c2157.75,1759.33) 2157.75,1801.57 ccw(c2157.75,1843.82) LED78.5@2187.63,1813.95 ; LED66.5@2187.63,2089.2 ccw(c2157.75,2059.33) 2157.75,2101.57 ccw(c2157.75,2143.82) LED66.5@2187.63,2113.95 ; LED54.5@2187.63,2389.2 ccw(c2157.75,2359.33) 2157.75,2401.57 ccw(c2157.75,2443.82) LED54.5@2187.63,2413.95 ; LED42.5@2187.63,2689.2 ccw(c2157.75,2659.33) 2157.75,2701.57 ccw(c2157.75,2743.82) LED42.5@2187.63,2713.95 ; LED30.5@2187.63,2989.2 ccw(c2157.75,2959.33) 2157.75,3001.57 ccw(c2157.75,3043.82) LED30.5@2187.63,3013.95 ; LED18.5@2187.63,3289.2 ccw(c2157.75,3259.33) 2157.75,3301.57 ccw(c2157.75,3343.82) LED18.5@2187.63,3313.95 ; LED6.5@2187.63,3589.2 ccw(c2157.75,3559.33) 2157.75,3601.57 ccw(c2157.75,3643.82) LED6.5@2187.63,3613.95 ; LED6.5@2187.63,3616.45 ccw(c2157.75,3646.32) 2200,3646.32 ccw(c2242.25,3646.32) LED6.5@2212.37,3616.45 ; v1@2190.92,3646.4 cw(c2177.54,3633.73) 2195.35,3628.96 ; v1@2191.16,3646.16 cw(c2169.82,3624.82) 2200,3624.82 cw(c2230.18,3624.82) v1@2208.84,3646.16 ; v1@2193.75,3644.17 cw(c2182.49,3624.68) 2204.24,3630.51 ; 2195.76,3630.51 cw(c2217.51,3624.68) v1@2206.25,3644.17 ; v1(2200,3655) LED6.5@2200,3601.57 ; 2204.65,3628.96 cw(c2222.46,3633.73) v1@2209.08,3646.4 ; LED138.5@2212.37,289.2 cw(c2242.25,259.33) 2242.25,301.57 cw(c2242.25,343.82) LED138.5@2212.37,313.95 ; LED126.5@2212.37,589.2 cw(c2242.25,559.33) 2242.25,601.57 cw(c2242.25,643.82) LED126.5@2212.37,613.95 ; LED114.5@2212.37,889.2 cw(c2242.25,859.33) 2242.25,901.57 cw(c2242.25,943.82) LED114.5@2212.37,913.95 ; LED102.5@2212.37,1189.2 cw(c2242.25,1159.33) 2242.25,1201.57 cw(c2242.25,1243.82) LED102.5@2212.37,1213.95 ; LED90.5@2212.37,1489.2 cw(c2242.25,1459.33) 2242.25,1501.57 cw(c2242.25,1543.82) LED90.5@2212.37,1513.95 ; LED78.5@2212.37,1789.2 cw(c2242.25,1759.33) 2242.25,1801.57 cw(c2242.25,1843.82) LED78.5@2212.37,1813.95 ; LED66.5@2212.37,2089.2 cw(c2242.25,2059.33) 2242.25,2101.57 cw(c2242.25,2143.82) LED66.5@2212.37,2113.95 ; LED54.5@2212.37,2389.2 cw(c2242.25,2359.33) 2242.25,2401.57 cw(c2242.25,2443.82) LED54.5@2212.37,2413.95 ; LED42.5@2212.37,2689.2 cw(c2242.25,2659.33) 2242.25,2701.57 cw(c2242.25,2743.82) LED42.5@2212.37,2713.95 ; LED30.5@2212.37,2989.2 cw(c2242.25,2959.33) 2242.25,3001.57 cw(c2242.25,3043.82) LED30.5@2212.37,3013.95 ; LED18.5@2212.37,3289.2 cw(c2242.25,3259.33) 2242.25,3301.57 cw(c2242.25,3343.82) LED18.5@2212.37,3313.95 ; LED6.5@2212.37,3589.2 cw(c2242.25,3559.33) 2242.25,3601.57 cw(c2242.25,3643.82) LED6.5@2212.37,3613.95 ; LED138.5@2215.16,295.32 cw(c2231.02,286.17) 2226.28,303.86 ; LED138.5@2215.16,307.82 ccw(c2231.02,316.98) 2226.28,299.29 ; LED126.5@2215.16,595.32 cw(c2231.02,586.17) 2226.28,603.86 ; LED126.5@2215.16,607.82 ccw(c2231.02,616.98) 2226.28,599.29 ; LED114.5@2215.16,895.32 cw(c2231.02,886.17) 2226.28,903.86 ; LED114.5@2215.16,907.82 ccw(c2231.02,916.98) 2226.28,899.29 ; LED102.5@2215.16,1195.32 cw(c2231.02,1186.17) 2226.28,1203.86 ; LED102.5@2215.16,1207.82 ccw(c2231.02,1216.98) 2226.28,1199.29 ; LED90.5@2215.16,1495.32 cw(c2231.02,1486.17) 2226.28,1503.86 ; LED90.5@2215.16,1507.82 ccw(c2231.02,1516.98) 2226.28,1499.29 ; LED78.5@2215.16,1795.32 cw(c2231.02,1786.17) 2226.28,1803.86 ; LED78.5@2215.16,1807.82 ccw(c2231.02,1816.98) 2226.28,1799.29 ; LED66.5@2215.16,2095.32 cw(c2231.02,2086.17) 2226.28,2103.86 ; LED66.5@2215.16,2107.82 ccw(c2231.02,2116.98) 2226.28,2099.29 ; LED54.5@2215.16,2395.32 cw(c2231.02,2386.17) 2226.28,2403.86 ; LED54.5@2215.16,2407.82 ccw(c2231.02,2416.98) 2226.28,2399.29 ; LED42.5@2215.16,2695.32 cw(c2231.02,2686.17) 2226.28,2703.86 ; LED42.5@2215.16,2707.82 ccw(c2231.02,2716.98) 2226.28,2699.29 ; LED30.5@2215.16,2995.32 cw(c2231.02,2986.17) 2226.28,3003.86 ; LED30.5@2215.16,3007.82 ccw(c2231.02,3016.98) 2226.28,2999.29 ; LED18.5@2215.16,3295.32 cw(c2231.02,3286.17) 2226.28,3303.86 ; LED18.5@2215.16,3307.82 ccw(c2231.02,3316.98) 2226.28,3299.29 ; LED6.5@2215.16,3595.32 cw(c2231.02,3586.17) 2226.28,3603.86 ; LED6.5@2215.16,3607.82 ccw(c2231.02,3616.98) 2226.28,3599.29 ; LED138.5@2216.56,293.41 cw(c2224.87,290.57) 2227.15,299.06 ; LED138.5@2216.56,309.74 ccw(c2224.87,312.58) 2227.15,304.09 ; LED126.5@2216.56,593.41 cw(c2224.87,590.57) 2227.15,599.06 ; LED126.5@2216.56,609.74 ccw(c2224.87,612.58) 2227.15,604.09 ; LED114.5@2216.56,893.41 cw(c2224.87,890.57) 2227.15,899.06 ; LED114.5@2216.56,909.74 ccw(c2224.87,912.58) 2227.15,904.09 ; LED102.5@2216.56,1193.41 cw(c2224.87,1190.57) 2227.15,1199.06 ; LED102.5@2216.56,1209.74 ccw(c2224.87,1212.58) 2227.15,1204.09 ; LED90.5@2216.56,1493.41 cw(c2224.87,1490.57) 2227.15,1499.06 ; LED90.5@2216.56,1509.74 ccw(c2224.87,1512.58) 2227.15,1504.09 ; LED78.5@2216.56,1793.41 cw(c2224.87,1790.57) 2227.15,1799.06 ; LED78.5@2216.56,1809.74 ccw(c2224.87,1812.58) 2227.15,1804.09 ; LED66.5@2216.56,2093.41 cw(c2224.87,2090.57) 2227.15,2099.06 ; LED66.5@2216.56,2109.74 ccw(c2224.87,2112.58) 2227.15,2104.09 ; LED54.5@2216.56,2393.41 cw(c2224.87,2390.57) 2227.15,2399.06 ; LED54.5@2216.56,2409.74 ccw(c2224.87,2412.58) 2227.15,2404.09 ; LED42.5@2216.56,2693.41 cw(c2224.87,2690.57) 2227.15,2699.06 ; LED42.5@2216.56,2709.74 ccw(c2224.87,2712.58) 2227.15,2704.09 ; LED30.5@2216.56,2993.41 cw(c2224.87,2990.57) 2227.15,2999.06 ; LED30.5@2216.56,3009.74 ccw(c2224.87,3012.58) 2227.15,3004.09 ; LED18.5@2216.56,3293.41 cw(c2224.87,3290.57) 2227.15,3299.06 ; LED18.5@2216.56,3309.74 ccw(c2224.87,3312.58) 2227.15,3304.09 ; LED6.5@2216.56,3593.41 cw(c2224.87,3590.57) 2227.15,3599.06 ; LED6.5@2216.56,3609.74 ccw(c2224.87,3612.58) 2227.15,3604.09 ; LED138.4@2247.63,289.2 ccw(c2217.75,259.33) 2217.75,301.57 ccw(c2217.75,343.82) LED138.4@2247.63,313.95 ; LED126.4@2247.63,589.2 ccw(c2217.75,559.33) 2217.75,601.57 ccw(c2217.75,643.82) LED126.4@2247.63,613.95 ; LED114.4@2247.63,889.2 ccw(c2217.75,859.33) 2217.75,901.57 ccw(c2217.75,943.82) LED114.4@2247.63,913.95 ; LED102.4@2247.63,1189.2 ccw(c2217.75,1159.33) 2217.75,1201.57 ccw(c2217.75,1243.82) LED102.4@2247.63,1213.95 ; LED90.4@2247.63,1489.2 ccw(c2217.75,1459.33) 2217.75,1501.57 ccw(c2217.75,1543.82) LED90.4@2247.63,1513.95 ; LED78.4@2247.63,1789.2 ccw(c2217.75,1759.33) 2217.75,1801.57 ccw(c2217.75,1843.82) LED78.4@2247.63,1813.95 ; LED66.4@2247.63,2089.2 ccw(c2217.75,2059.33) 2217.75,2101.57 ccw(c2217.75,2143.82) LED66.4@2247.63,2113.95 ; LED54.4@2247.63,2389.2 ccw(c2217.75,2359.33) 2217.75,2401.57 ccw(c2217.75,2443.82) LED54.4@2247.63,2413.95 ; LED42.4@2247.63,2689.2 ccw(c2217.75,2659.33) 2217.75,2701.57 ccw(c2217.75,2743.82) LED42.4@2247.63,2713.95 ; LED30.4@2247.63,2989.2 ccw(c2217.75,2959.33) 2217.75,3001.57 ccw(c2217.75,3043.82) LED30.4@2247.63,3013.95 ; LED18.4@2247.63,3289.2 ccw(c2217.75,3259.33) 2217.75,3301.57 ccw(c2217.75,3343.82) LED18.4@2247.63,3313.95 ; LED6.4@2247.63,3589.2 ccw(c2217.75,3559.33) 2217.75,3601.57 ccw(c2217.75,3643.82) LED6.4@2247.63,3613.95 ; LED6.4@2260,3601.57 LED6.5@2200,3601.57